# Altium PCB WINGS.PcbDoc
Units mm, origin at the board's own origin, x right, y up, seen from the top; angles counter-clockwise.
Board outline 25 x 15 mm, 4 copper layers (Top, GND_1, GND_2, Bottom), stack 0.76 mm thick; 5 components, 16 nets, 67 pads, 41 vias.
Unrouted connection lines stored in the file: 105.
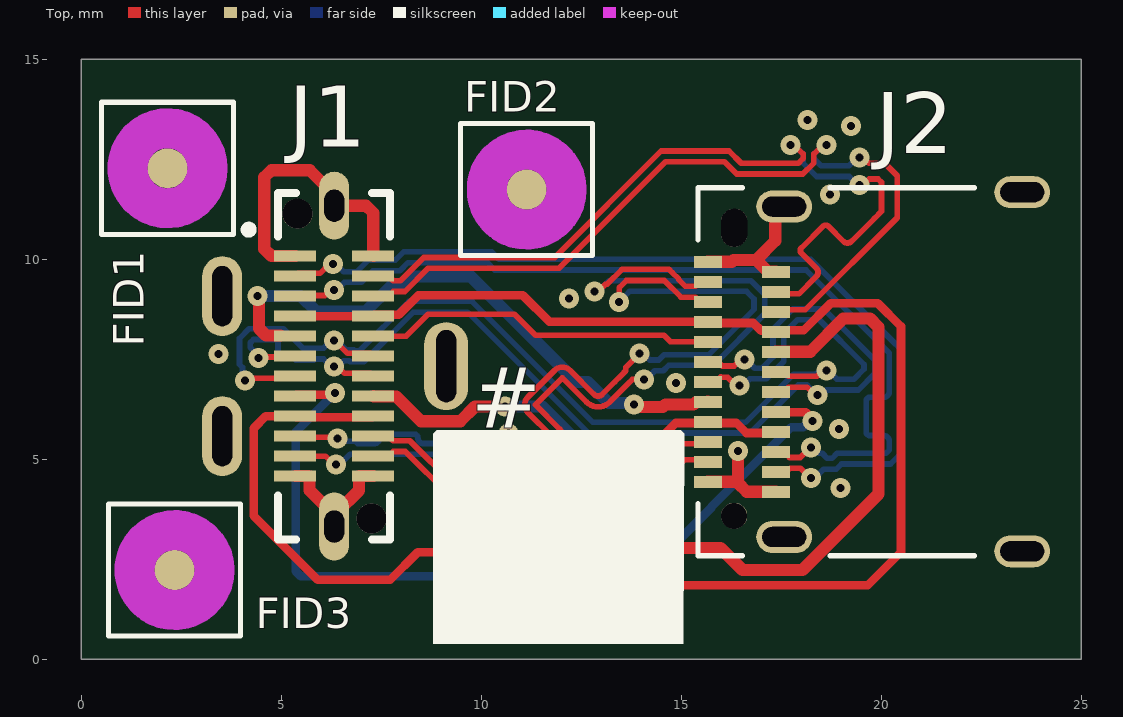
[diagram p0: Top view]
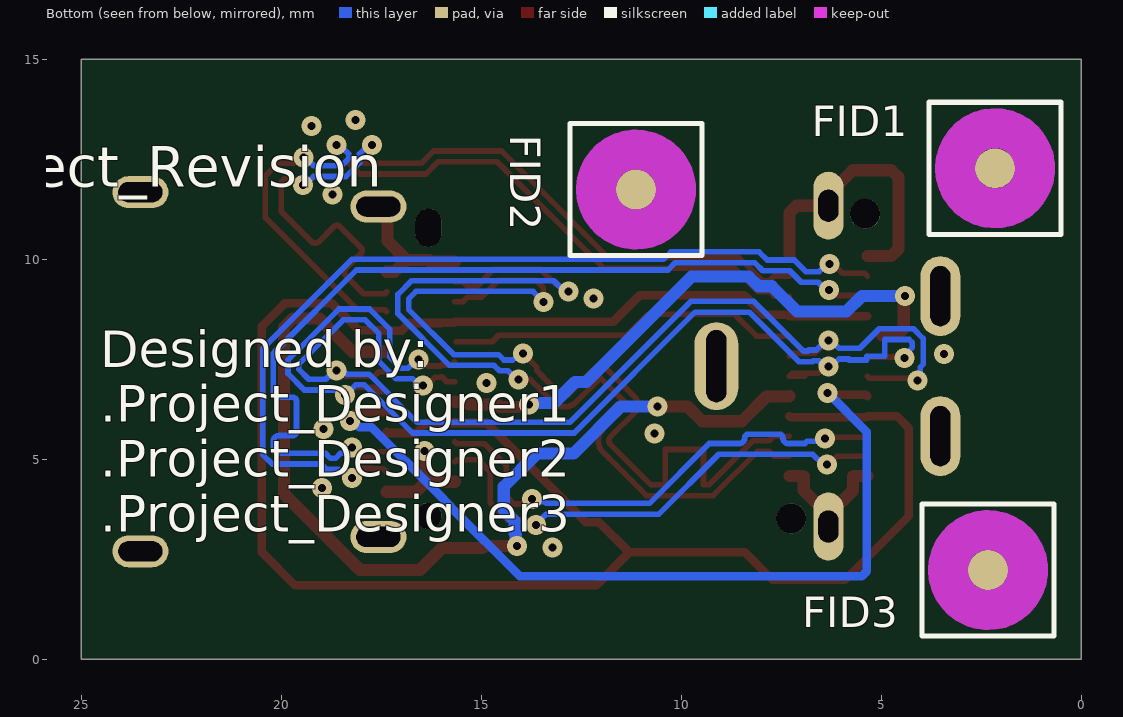
[diagram p1: Bottom view, seen from below]
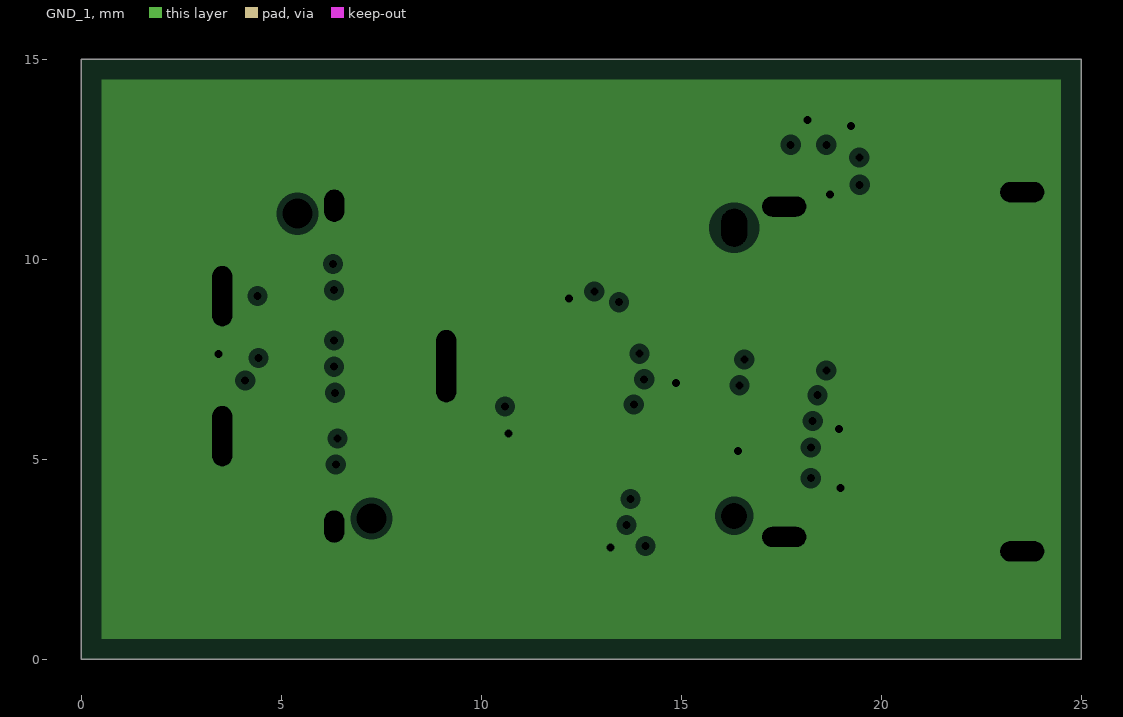
[diagram p2: GND_1, clearances drawn from the general rule]
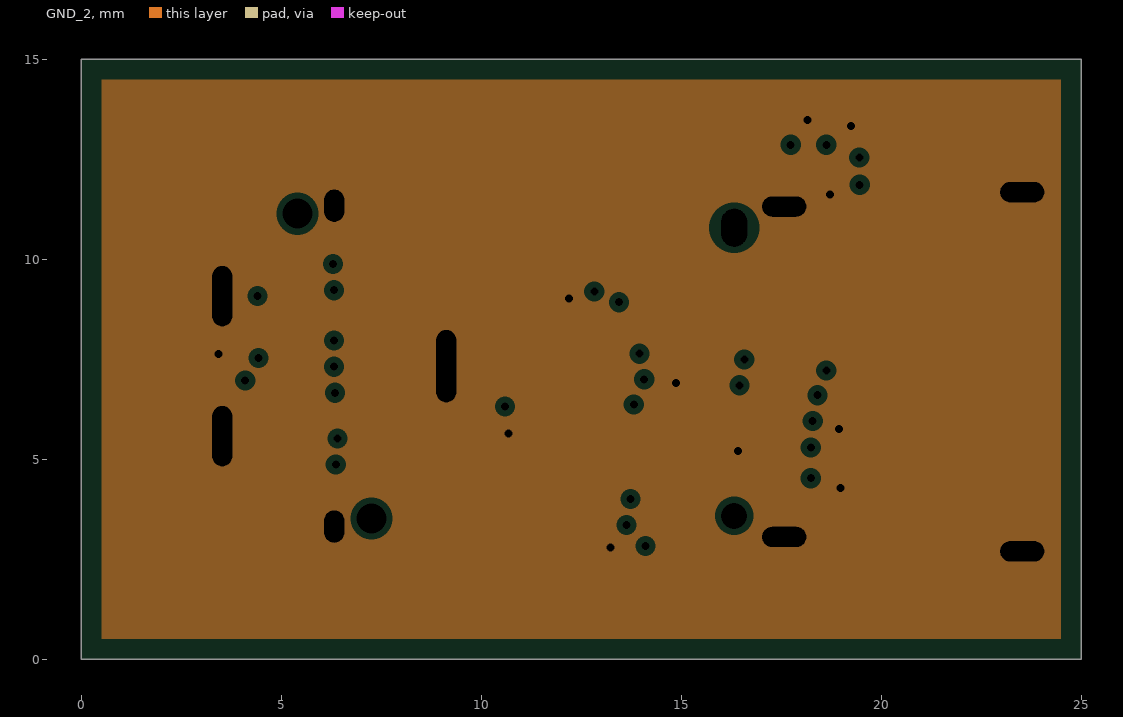
[diagram p3: GND_2, clearances drawn from the general rule]

## Layer stack, top to bottom
Top Solder: solder mask 0.0254, Solder Resist, Dk 4
Top: signal copper 0.035
Dielectric 1: prepreg 0.11, PP-015, Dk 4.29
GND_1: plane copper 0.035, net GND
Dielectric 2: core 0.4, Core-034, Dk 4.29
GND_2: plane copper 0.035, net GND
Dielectric 3: prepreg 0.11, PP-015, Dk 4.29
Bottom: signal copper 0.035
Bottom Solder: solder mask 0.0152, Solder Resist, Dk 4

## Board outline
0,0 0,15 25,15 25,0

## Design rules (kind name [scope] priority, off if disabled: settings)
BoardOutlineClearance BoardOutlineClearance-Silk [(OnLayer('Bottom Overlay')) OR (OnLayer('Top Overlay'))] p1: gap=0 ignorepadtopadclearanceinfootprint=FALSE
BoardOutlineClearance BoardOutlineClearance-Fiducials [InComponentClass('Fiducials')] p2: gap=0 ignorepadtopadclearanceinfootprint=FALSE
BoardOutlineClearance BoardOutlineClearance-MouseBites [InComponentClass('MouseBites')] p3: gap=0.254 ignorepadtopadclearanceinfootprint=FALSE except(0: Arc-SplitContinuation Track-SplitContinuation SMDPad-SplitContinuation THPad-OutlineEdge THPad-CavityEdge THPad-CutoutEdge THPad-SplitBarrior THPad-SplitContinuation Via-SplitContinuation Fill-SplitContinuation Poly-SplitContinuation Region-OutlineEdge Region-CavityEdge Region-CutoutEdge Region-SplitBarrior Region-SplitContinuation Text-SplitContinuation; 0.508: Arc-OutlineEdge Track-OutlineEdge SMDPad-OutlineEdge Via-OutlineEdge Fill-OutlineEdge Poly-OutlineEdge Text-OutlineEdge)
BoardOutlineClearance [All] p4: gap=0.305 ignorepadtopadclearanceinfootprint=FALSE
Clearance Clearance_HOLE_2_PAD [IsVia and (NOT InAnyComponent) vs IsSMTPin Or IsThruPin  or IsVia] p1: gap=0 ignorepadtopadclearanceinfootprint=FALSE except(0.051: SMDPad-Via THPad-Via; 0.152: Via-Via)
Clearance Clearance_VIA_SAME [IsVia and (NOT InAnyComponent) vs IsVia and (NOT InAnyComponent)] p2: gap=0.132 ignorepadtopadclearanceinfootprint=FALSE
Clearance Clearance_VIA [IsVia AND (InAnyComponent) vs IsVia AND (InAnyComponent)] p3: gap=0.31 ignorepadtopadclearanceinfootprint=FALSE
Clearance Clearance_GEN [All] p4: gap=0.127 ignorepadtopadclearanceinfootprint=FALSE
ComponentClearance [All] p1: gap=0.102 collisioncheckmode=3 verticalgap=0.102 showdistances=FALSE
DiffPairsRouting DIFF_100_OHM [InDifferentialPairClass('DIFF_100')] p1: maxlimit=0.127 minlimit=0.127 mostfreqgap=0.127 toplayer_minwidth=0.127 toplayer_maxwidth=0.127 toplayer_prefwidth=0.127 bottomlayer_minwidth=0.127 bottomlayer_maxwidth=0.127 bottomlayer_prefwidth=0.127 maxuncoupledlength=12.7
DiffPairsRouting DIFF_90_OHM [InDifferentialPairClass('DIFF_90')] p2: maxlimit=0.127 minlimit=0.127 mostfreqgap=0.127 toplayer_mingap=0.127 toplayer_minwidth=0.141 toplayer_maxwidth=0.141 toplayer_prefwidth=0.141 bottomlayer_maxgap=0.127 bottomlayer_prefgap=0.127 bottomlayer_minwidth=0.141 bottomlayer_maxwidth=0.141 bottomlayer_prefwidth=0.141 maxuncoupledlength=12.7
DiffPairsRouting DIFF_85_OHM [InDifferentialPairClass('DIFF_85')] p3: maxlimit=0.127 minlimit=0.127 mostfreqgap=0.127 toplayer_minwidth=0.216 toplayer_maxwidth=0.216 toplayer_prefwidth=0.216 bottomlayer_minwidth=0.216 bottomlayer_maxwidth=0.216 bottomlayer_prefwidth=0.216 maxuncoupledlength=12.7
HoleSize [All] p1: absolutevalues=TRUE maxlimit=6.5 minlimit=0.2 maxpercent=80.000 minpercent=20.000
HoleToHoleClearance HoleToHoleClearance_Via [All] p1: gap=0.203 allowstackedmicrovias=TRUE
MatchedLengths [InNetClass('TX')] p1: tolerance=0.051 checknetsindiffpair=FALSE checkdiffpairvsdiffpair=TRUE checkxsignals=TRUE checkothers=TRUE
MatchedLengths DiffMatching_WithinPair [InDifferentialPairClass('All Differential Pairs')] p2: tolerance=0.025 checknetsindiffpair=TRUE checkdiffpairvsdiffpair=FALSE checkxsignals=FALSE checkothers=FALSE
MinimumAnnularRing [All] p1: minimumring=0.1
MinimumSolderMaskSliver [All] p1: minsoldermaskwidth=0.1
PasteMaskExpansion [All] p1: expansion=-0.025
PlaneClearance [All] p1: clearance=0.152
PlaneConnect [All] p1: pad.planeconnectstyle=Relief pad.reliefexpansion=0.508 pad.reliefentries=4 pad.reliefconductorwidth=0.254 pad.reliefairgap=0.254 via.planeconnectstyle=Direct via.reliefexpansion=0.508 via.reliefentries=4 via.reliefconductorwidth=0.254 via.reliefairgap=0.254
PolygonConnect [All] p1: thpad.connectstyle=Relief thpad.reliefconductorwidth=0.254 thpad.reliefentries=4 thpad.polygonreliefangle="90 Angle" thpad.airgapwidth=0.254 smdpad.connectstyle=Direct smdpad.reliefconductorwidth=0.254 smdpad.reliefentries=4 smdpad.polygonreliefangle="90 Angle" smdpad.airgapwidth=0.254 via.connectstyle=Direct via.reliefconductorwidth=0.254 via.reliefentries=4 via.polygonreliefangle="90 Angle" via.airgapwidth=0.254
RoutingVias [All] p1: holewidth=0.25 width=0.55 viastyle="Through Hole" minholewidth=0.2 minwidth=0.5 maxholewidth=6.5 maxwidth=7.5
SilkToSilkClearance [All] p1: silktosilkclearance=0.025
SilkToSolderMaskClearance [IsPad] p1: minsilkscreentomaskgap=0.025 clearancetoexposedcopper=FALSE
SolderMaskExpansion [All] p1: expansion=0.07 istentingtop=FALSE
UnRoutedNet [All] p1: checkbadconnections=TRUE
Width Width_50_OHM [InNetClass('SE_50OHM')] p1: maxlimit=0.17 minlimit=0.17 preferedwidth=0.17 impedanceprofiledriven=TRUE impedanceprofileid={45CFA21F-16DB-42DB-9CA8-E4EF8CB52553} impedanceprofilevalue=50.000000 minimp=50.000000 maximp=50.000000 favimp=50.000000
Width [All] p2: maxlimit=2.54 minlimit=0.102 preferedwidth=0.305 minimp=50.000000 maximp=50.000000 favimp=50.000000
19 further rules are at their usual default settings.

## Classes and differential pairs
differential pair class DIFF_90: FC_D FC_RX1 FC_RX2 FC_TX1 FC_TX2
net class TX: FC_RX1_N FC_RX1_P FC_RX2_N FC_RX2_P
component class WINGS_Title: FID1 FID2 FID3
component class TOP: J1 J2
differential pair FC_TX2: +FC_TX2_P -FC_TX2_N
differential pair FC_TX1: +FC_TX1_P -FC_TX1_N
differential pair FC_RX2: +FC_RX2_P -FC_RX2_N
differential pair FC_RX1: +FC_RX1_P -FC_RX1_N
differential pair FC_D: +FC_D_P -FC_D_N

## Components (designator, comment, footprint, x,y, rotation, side; value= is the part's Value field where it differs from the comment)
FID1 "FID 1MM" FID_CIRCLE_1MM 2.156,12.276 r0 top
FID2 "FID 1MM" FID_CIRCLE_1MM 11.133,11.744 r0 top
FID3 "FID 1MM" FID_CIRCLE_1MM 2.331,2.231 r0 top
J1 "USB4151-GF-C" CON_USB-C_USB4151-GF-C 6.323,7.33 r90 top locked value="USB 3.2 Type C"
J2 "12401598E4#2A" CON_USB_3.2_TypeC_12401598E4#2A 16.323,7.189 r90 top locked value="USB 3.2 Type C"

## Footprints (in the part's own frame and the unit in brackets; to place one, negate y for a bottom-side part, rotate by r counter-clockwise, add the part's x,y. Pads: shape width x height; smd on the part's side, far side on the other; paste and mask are expansions set on the pad)
CON_USB-C_USB4151-GF-C [mm] "USB-C plug Vertical"
  rect 0.28x1.05 smd mask+0.045: A1(2.75,0.975) A2(2.25,0.975) A3(1.75,0.975) A4(1.25,0.975) A5(0.75,0.975) A6(0.25,0.975) A7(-0.25,0.975) A8(-0.75,0.975) A9(-1.25,0.975) A10(-1.75,0.975) A11(-2.25,0.975) A12(-2.75,0.975) B1(-2.75,-0.975) B2(-2.25,-0.975) B3(-1.75,-0.975) B4(-1.25,-0.975) B5(-0.75,-0.975) B6(-0.25,-0.975) B7(0.25,-0.975) B8(0.75,-0.975) B9(1.25,-0.975) B10(1.75,-0.975) B11(2.25,-0.975) B12(2.75,-0.975)
  oval 1.7x0.75 hole 0.5 slot 0.8 at 0 deg mask+0.05: S1(-4.01,0) S4(4.01,0)
  oval 2x1 hole 0.5 slot 1.5 at 0 deg mask+0.05: S2(-1.75,2.8) S3(1.75,2.8)
  oval 2.2x1.1 hole 0.5 slot 1.8 at 0 deg mask+0.05: S5(0,-2.8)
  round 0.75 hole 0.75 unplated mask+0: ""(-3.81,-0.93) ""(3.81,0.92)
  silkscreen extent -4.33,-1.4 4.33,2.24, body extent -4.33,-2.88 4.33,2.88, height 11.1
CON_USB_3.2_TypeC_12401598E4#2A [mm]
  oval 0.8x1.4 hole 0.5 slot 1.1 at 90 deg paste+0 mask+0.07: 1(-4.13,-1.25) 2(-4.49,-7.2) 3(4.49,-7.2) 4(4.13,-1.25)
  rect 0.3x0.7 smd paste-0.025 mask+0.04: A1(-2.75,0.66) A2(-2.25,0.66) A3(-1.75,0.66) A4(-1.25,0.66) A5(-0.75,0.66) A6(-0.25,0.66) A7(0.25,0.66) A8(0.75,0.66) A9(1.25,0.66) A10(1.75,0.66) A11(2.25,0.66) A12(2.75,0.66) B1(2.5,-1.04) B2(2,-1.04) B3(1.5,-1.04) B4(1,-1.04) B5(0.5,-1.04) B6(0,-1.04) B7(-0.5,-1.04) B8(-1,-1.04) B9(-1.5,-1.04) B10(-2,-1.04) B11(-2.5,-1.04) B12(-3,-1.04)
  round 0.65 hole 0.65 unplated mask+0.07: ""(-3.6,0)
  oval 0.95x0.65 hole 0.65 slot 0.95 at 0 deg paste+0 mask+0.07: ""(3.6,0)
  silkscreen extent -4.6,-6 4.6,0.91, body extent -4.6,-9.6 4.6,0.9, height 3.28
FID_CIRCLE_1MM [mm]
  round 1 smd paste-1 mask+1: 1(0,0)
  round 1 smd far side paste-1 mask+1: 2(0,0)
  Top keep-out circle w1: c0,0 r1
  Bottom keep-out circle w1: c0,0 r1
  silkscreen extent -1.65,-1.65 1.65,1.65

## Part data
FID1 FID2 FID3: library part FID_CIRCLE_1MM, "FID - FIDUCIAL 1MM CIRCLE DOUBLE-SIDED - 1MM", Package="1MM CIRCLE", Assembly Type=NONE, CreatedBy/Date="Jonathan Bouchard 2018-07-23", Cryo=UNKNOWN, GRAMS Lib Spec=2.8, HelpURL=https://www.pcb-3d.com/wordpress/wp-content/uploads/ipc-sm-782a_amendment_1_and_2.pdf, Magnetic Material=NO, Solder Paste Type=UNKNOWN, Stencil Thickness (Recommended)=UNKNOWN, VerifiedBy="Caroline Paulin - 25 juillet 2018"
J1: library part CON_USB_3.2_TypeC_USB4151-GF-C, "CON - USB-C (USB TYPE-C) USB 3.2 Gen 1 (USB 3.1 Gen 1, Superspeed (USB 3.0)) Plug Connector 24 Position Surface Mount, Through Hole", Current Rating="5A total", Manufacturer #1=GCT, Package=SMD/TH, Power Max=-, Supplier Part Number 1=2073-USB4151-GF-CCT-ND, Temperature="-40°C ~ 85°C", Voltage Rating=20VDC, Assembly Type=SMD/TH, CreatedBy/Date="Philippe Arsenault/2021-08-17", GRAMS Lib Spec=2.8, HelpURL=https://gct.co/connector/usb4151, Magnetic Material=Unknown, Note=Vertical, Part Number #1=USB4151-GF-C, Polarized=Yes, Supplier 1=Digi-Key, VerifiedBy="Hubert Dube/2021-09-02"
J2: library part CON_USB_3.2_TypeC_12401598E4#2A, "CON_USB - USB 3.2 Gen 2 (USB 3.1 Gen 2, Superspeed + (USB 3.1)) 24 pos Receptacle - R/A", Current Rating="5A total", Manufacturer #1="Amphenol ICC (Commercial Products)", Package="SMD + TH R/A", Power Max=-, Supplier Part Number 1=12401598E4#2ACT-ND, Temperature="max 105°C", Assembly Type="SMD + TH", CreatedBy/Date="Louis-Daniel Gaulin / 07-04-2021", GRAMS Lib Spec=2.8, HelpURL=https://www.amphenol-icc.com/media/wysiwyg/files/drawing/12401598xxx2a.pdf, Magnetic Material=Unknown, Part Number #1=12401598E4#2A, Polarized=Yes, Supplier 1=Digi-Key, VerifiedBy="Philippe Arsenault/2021-04-08", Voltage Rating=-

## Via types
v1: diameter 0.5, hole 0.2, Top to Bottom, tented both sides, 41 vias

## Nets (pads, with @x,y where several pads share a name; then routed paths per layer and width w, separated by ;. In a path a pad name is that pad's centre, name@x,y a point inside that pad or via, vN(x,y) a via of type N, cw(c..) or ccw(c..) an arc to the next point about the centre after c; other vN are vias at no path point)
5V: J1.A4 J1.A9 J1.B4 J1.B9 J2.A4 J2.A9 J2.B4 J2.B9 | length 52.5
  Top w0.216: J1.A4 J1.B9 7.33,8.612 7.937,8.612 8.427,9.102 11.039,9.102 11.702,8.439 J2.A9 15.686,8.416 16.006,8.416 16.015,8.407 16.801,8.407 16.996,8.212 J2.B4@17.391,8.212 ; J1.B4 7.266,6.048 5.38,6.048 J1.A9 4.611,6.08 4.31,5.779 4.31,3.585 5.91,1.985 7.72,1.985 8.41,2.675 11.303,2.675 ; J2.B9 17.331,5.657 16.627,5.657 16.377,5.907 15.695,5.907 J2.A4 15.631,5.907 14.863,5.907 12.384,3.428 12.056,3.428 11.303,2.675 ; J2.B4@17.471,8.217 17.485,8.231 18.064,8.231 18.738,8.905 19.908,8.905 20.491,8.323 20.491,2.684 19.656,1.848 12.129,1.848 11.303,2.675
CC1: J1.A5 J2.A5 | length 14.6
  Top w0.305: v1(4.402,9.086) 4.439,9.049 4.439,8.271 4.618,8.093 4.868,8.093 J1.A5@4.975,8.092 ; v1(13.811,6.373) 13.864,6.373 13.93,6.306 14.537,6.306 14.604,6.373 15.308,6.373 15.372,6.437 15.66,6.437 J2.A5
  Bottom w0.305: v1(4.402,9.086) 5.486,9.086 5.873,8.699 7.11,8.699 7.739,9.328 8.074,9.328 8.313,9.567 9.744,9.567 12.377,6.934 12.66,6.934 13.184,6.41 13.774,6.41 v1(13.811,6.373)
CC2: J1.B5 J2.B5 | length 24
  Top w0.305: J1.B5 7.311,6.568 7.873,6.568 8.49,5.951 9.476,5.951 9.843,6.318 v1(10.592,6.318) ; v1(14.103,2.83) 14.918,2.83 14.963,2.785 15.982,2.785 16.531,2.236 18.033,2.236 19.93,4.133 19.93,8.304 19.717,8.518 19.049,8.518 18.221,7.689 J2.B5
  Bottom w0.305: v1(10.592,6.318) 11.521,6.318 12.692,5.147 13.606,5.147 14.437,4.316 14.437,3.737 14.167,3.467 14.167,3.151 14.141,3.125 14.141,2.867 v1(14.103,2.83)
FC_D_N: J1.A6 J1.B6 J2.A7 J2.B7 | length 29.2
  Top w0.141: v1(4.426,7.534) 4.449,7.557 5.325,7.557 J1.A6 ; v1(6.321,7.316) 6.418,7.316 6.584,7.15 7.229,7.15 J1.B6 J1.B6@6.913,7.08 ; J2.A7 15.742,7.36 15.999,7.36 16.025,7.334 16.319,7.334 16.478,7.493 v1(16.575,7.493) ; J2.B7 17.563,6.689 17.679,6.805 18.143,6.805 18.345,6.603 v1(18.405,6.603)
  Bottom w0.141: v1(4.426,7.534) 4.426,7.592 4.223,7.796 4.223,7.913 4.305,7.996 4.846,7.996 4.917,7.996 4.917,7.573 5.363,7.573 5.363,7.485 5.81,7.485 5.81,7.508 6.058,7.508 6.247,7.319 6.251,7.316 v1(6.321,7.316) 6.418,7.316 6.565,7.463 6.7,7.463 6.722,7.441 7.061,7.441 8.3,8.68 9.654,8.68 12.678,5.657 16.717,5.657 17.923,6.862 18.143,6.862 18.402,6.603 v1(18.405,6.603) 18.502,6.603 18.634,6.734 19.426,6.734 19.835,7.143 19.835,7.483 18.561,8.757 17.793,8.757 17.292,8.255 17.292,7.556 17.014,7.278 16.837,7.278 16.623,7.493 v1(16.575,7.493)
FC_D_P: J1.A7 J1.B7 J2.A6 J2.B6 | length 29.2
  Top w0.141: v1(4.098,6.97) 4.153,7.025 5.293,7.025 J1.A7 ; v1(6.321,7.968) 6.337,7.968 6.655,7.65 7.229,7.65 J1.B7 ; J2.A6 15.863,6.939 15.99,7.066 16.004,7.052 16.158,7.052 16.359,6.851 v1(16.456,6.851) ; J2.B6 17.563,7.189 17.679,7.073 18.385,7.073 18.528,7.217 v1(18.626,7.217)
  Bottom w0.141: v1(4.098,6.97) 4.029,7.039 4.029,7.298 3.954,7.373 3.954,8.024 4.194,8.264 5.051,8.264 5.539,7.776 6.058,7.776 6.251,7.968 v1(6.321,7.968) 6.391,7.968 6.628,7.731 6.811,7.731 6.833,7.709 6.95,7.709 8.189,8.949 9.765,8.949 12.789,5.925 16.606,5.925 17.812,7.131 18.363,7.131 18.381,7.148 18.557,7.148 v1(18.626,7.217) 18.674,7.217 18.888,7.003 19.315,7.003 19.566,7.254 19.566,7.371 18.449,8.488 17.905,8.488 17.56,8.144 17.56,7.445 17.125,7.01 16.712,7.01 16.553,6.851 v1(16.456,6.851)
FC_RX1_N: J1.A3 J2.B10 | length 22.5
  Top w0.141: J1.A3@5.348,9.08 5.365,9.097 6.085,9.097 6.216,9.228 v1(6.313,9.228) ; J2.B10 17.563,5.189 17.706,5.046 17.974,5.046 18.224,5.296 v1(18.236,5.296)
  Bottom w0.141: v1(6.313,9.228) 6.379,9.228 6.576,9.425 7.002,9.425 7.29,9.713 7.964,9.713 8.168,9.917 10.15,9.917 10.333,9.734 18.121,9.734 20.14,7.715 20.2,7.655 20.2,6.69 cw(c20.058,6.69) 20.058,6.549 19.715,6.549 ccw(c19.715,6.454) 19.619,6.454 19.619,5.69 ccw(c19.715,5.69) 19.715,5.595 20.058,5.595 cw(c20.058,5.453) 20.2,5.453 20.2,5.233 20.154,5.187 20.117,5.15 18.892,5.15 18.766,5.024 18.649,5.024 18.523,5.15 v1@18.436,5.15
FC_RX1_P: J1.A2 J2.B11 | length 22.7
  Top w0.141: J1.A2 5.418,9.65 5.965,9.65 6.196,9.881 v1(6.294,9.881) ; J2.B11 17.442,4.769 17.715,4.769 17.725,4.778 17.976,4.778 18.225,4.528 v1(18.238,4.528)
  Bottom w0.141: v1(6.294,9.881) 6.368,9.881 6.556,9.693 6.891,9.693 7.178,9.981 7.852,9.981 8.056,10.186 10.261,10.186 10.444,10.003 18.232,10.003 20.284,7.951 20.468,7.766 20.468,5.122 20.228,4.882 19.004,4.882 18.878,4.756 18.562,4.756 18.335,4.528 v1(18.238,4.528)
FC_RX2_N: J1.B3 J2.A10 | length 22.7
  Top w0.141: J1.B3@7.298,5.58 7.683,5.58 7.799,5.464 8.211,5.464 9.315,4.36 9.375,4.36 9.446,4.36 9.446,5.245 10.399,5.245 10.399,4.36 10.759,4.36 11.473,5.074 11.622,5.223 11.766,5.367 ; 11.766,5.568 11.161,6.173 cw(c11.35,6.363) 11.161,6.553 11.835,7.227 cw(c12.025,7.038) 12.215,7.227 12.82,6.621 ccw(c12.92,6.721) 13.02,6.621 13.345,6.946 ; 11.767,5.368 ccw(c11.667,5.468) 11.767,5.568 ; 13.345,6.946 13.489,7.09 13.612,7.213 13.612,7.298 v1(13.955,7.641) ; v1(13.443,8.929) 13.45,8.936 13.45,9.294 13.625,9.469 14.563,9.469 14.57,9.476 14.99,9.055 15.347,9.055 15.463,8.939 J2.A10
  Bottom w0.141: v1(13.443,8.929) 13.443,8.935 13.705,9.198 16.632,9.198 16.818,9.012 16.818,8.749 15.688,7.618 14.572,7.618 14.436,7.482 14.211,7.482 14.052,7.641 v1(13.955,7.641)
FC_RX2_P: J1.B2 J2.A11 | length 22.7
  Top w0.141: J1.B2 7.683,5.08 7.799,5.196 8.1,5.196 9.204,4.092 10.87,4.092 11.812,5.034 11.956,5.178 ccw(c11.667,5.468) 11.956,5.758 11.351,6.363 ; 11.351,6.364 12.024,7.037 ; 12.026,7.037 12.63,6.432 ccw(c12.92,6.721) 13.21,6.432 13.534,6.756 ; v1(12.825,9.198) 12.922,9.198 13.102,9.377 13.145,9.377 13.518,9.75 14.447,9.75 14.453,9.756 14.686,9.756 14.768,9.674 14.938,9.504 14.938,9.486 15.101,9.323 15.347,9.323 15.463,9.439 J2.A11 ; 13.535,6.757 13.679,6.901 13.778,7 v1(14.073,7)
  Bottom w0.141: v1(12.825,9.198) 12.922,9.198 13.19,9.466 16.743,9.466 17.087,9.123 17.087,8.637 15.799,7.35 14.683,7.35 14.547,7.214 14.335,7.214 14.121,7 v1(14.073,7)
FC_SBU1: J1.B8 J2.A8 | length 8.8
  Top w0.141: J1.B8 8.123,8.08 8.671,8.628 10.831,8.628 11.358,8.101 14.564,8.101 14.725,7.939 J2.A8@15.631,7.939
FC_SBU2: J1.A8 J2.B8 | length 21.5
  Top w0.216: J1.A8 5.38,6.612 6.289,6.612 v1(6.34,6.663) ; J2.B8 17.371,6.181 18.114,6.181 18.285,6.009 v1(18.285,5.961)
  Bottom w0.216: v1(6.34,6.663) 5.361,5.685 5.361,2.201 5.488,2.074 14.034,2.074 15.763,3.803 15.763,3.821 16.091,4.149 17.744,5.803 18.05,5.803 18.209,5.961 v1(18.285,5.961)
FC_TX1_N: J1.A10 J2.A3 | length 12.5
  Top w0.141: J1.A10@5.348,5.58 5.379,5.549 6.372,5.549 v1(6.403,5.519) ; v1(13.729,4.005) 13.821,4.005 13.944,3.882 14.185,3.882 14.377,4.075 14.377,4.849 14.917,5.388 15.612,5.388 J2.A3
  Bottom w0.141: v1(6.403,5.519) 6.471,5.45 6.851,5.45 6.907,5.394 7.248,5.394 7.319,5.394 ccw(c7.319,5.535) 7.46,5.535 cw(c7.555,5.535) 7.555,5.631 8.319,5.631 cw(c8.319,5.535) 8.414,5.535 ccw(c8.556,5.535) 8.556,5.394 8.828,5.394 9.301,5.394 10.797,3.898 13.377,3.898 13.416,3.937 13.661,3.937 v1(13.729,4.005)
FC_TX1_P: J1.A11 J2.A2 | length 12.4
  Top w0.141: J1.A11 6.101,5.08 6.313,4.868 v1(6.363,4.868) ; v1(13.628,3.361) 13.725,3.361 13.849,3.484 14.35,3.484 14.776,3.91 14.776,4.684 15.082,4.99 15.612,4.99 J2.A2
  Bottom w0.141: v1(6.363,4.868) 6.46,4.868 6.718,5.125 6.948,5.125 9.065,5.125 10.561,3.63 13.377,3.63 13.628,3.379 v1(13.628,3.361)
FC_TX2_N: J1.B10 J2.B3 | length 21.3
  Top w0.141: J1.B10@7.298,9.08 7.683,9.08 7.799,9.196 8.089,9.196 8.672,9.779 11.947,9.779 14.607,12.439 16.081,12.439 16.387,12.133 18.036,12.133 18.313,12.409 18.313,12.637 18.538,12.862 v1(18.623,12.862) ; J2.B3 17.416,8.742 18.102,8.742 20.398,11.038 20.398,12.088 20.085,12.402 19.692,12.402 19.547,12.547 v1(19.45,12.547)
  Bottom w0.141: v1(18.623,12.862) 18.539,12.862 18.313,12.636 18.313,12.519 18.493,12.339 19.188,12.339 19.396,12.547 v1(19.45,12.547)
FC_TX2_P: J1.B11 J2.B2 | length 21.3
  Top w0.141: J1.B11 7.683,9.58 7.799,9.464 7.978,9.464 8.561,10.047 11.836,10.047 14.496,12.707 16.192,12.707 16.498,12.401 17.925,12.401 18.045,12.52 18.045,12.637 17.819,12.862 v1(17.734,12.862) ; J2.B2 17.416,9.136 17.939,9.136 18.329,9.526 18.379,9.576 ccw(c18.279,9.676) 18.379,9.775 18.002,10.152 cw(c18.07,10.219) 18.002,10.287 18.542,10.826 cw(c18.609,10.759) 18.677,10.826 19.053,10.45 ccw(c19.153,10.549) 19.253,10.45 19.828,11.025 20.004,11.201 20.004,11.925 19.921,12.008 19.702,12.008 19.557,11.863 v1(19.46,11.863)
  Bottom w0.141: v1(17.734,12.862) 17.819,12.862 18.045,12.636 18.045,12.408 18.382,12.071 19.198,12.071 19.406,11.863 v1(19.46,11.863)
GND: J1.A1 J1.A12 J1.B1 J1.B12 J1.S1 J1.S2 J1.S3 J1.S4 J1.S5 J2.1 J2.2 J2.3 J2.4 J2.A1 J2.A12 J2.B1 J2.B12 | length 16.3
  Top w0.305: J1.A12 5.696,4.58 5.708,4.568 5.708,4.22 6.25,3.678 6.397,3.678 6.939,4.22 6.939,4.568 6.951,4.58 J1.B1 ; J1.A1 4.752,10.08 4.573,10.259 4.573,12.05 4.752,12.229 5.713,12.229 6.323,11.618 J1.S4 7.12,11.34 7.298,11.162 J1.B12 ; J2.A1 16.384,4.439 16.415,4.409 ; J2.A12 15.665,9.942 16.262,9.942 16.306,9.985 16.871,9.985 ; v1(16.415,5.209) 16.415,4.409 ; J2.B12 16.634,4.189 16.415,4.409 ; J2.B1 17.167,9.689 16.871,9.985 ; J2.4 17.348,11.095 17.348,10.462 16.871,9.985
  other v1: 13.227,2.792 18.984,4.285 10.673,5.65 18.945,5.762 14.868,6.902 3.434,7.63 12.196,9.022 18.717,11.623 19.241,13.334 18.152,13.488
pads on no net: FID1.1 FID1.2 FID2.1 FID2.2 FID3.1 FID3.2 J1. J2.

## Polygon pours and split planes (outlines as drawn)
no net on Top Overlay "NONET_L-01_P-001" (solid): 8.795,5.733 8.795,0.393 15.051,0.393 15.074,5.733
GND on GND_1 (split plane): 24.49,0.51 0.51,0.51 0.51,14.49 24.49,14.49
GND on GND_2 (split plane): 24.49,0.51 0.51,0.51 0.51,14.49 24.49,14.49

## Other copper
Top:
  text "LAYER 1: TOP" at 42.018,62.778 h2.54
Bottom:
  text "LAYER 4: BOTTOM" at 42.018,44.939 h2.54
GND_1 (plane layer: these items are gaps in the copper):
  text "LAYER 2: GND_1" at 42.018,56.69 h2.54
GND_2 (plane layer: these items are gaps in the copper):
  text "LAYER 2: GND_2" at 42.018,50.603 h2.54

## Silkscreen, mask and mechanical layers (free items; w line width, h text height)
Top Overlay:
  text "TOP SILKSCREEN" at 42.018,74.106 h2.54
  text "#" at 9.752,5.786 h1.52
Bottom Overlay:
  text "BOTTOM SILKSCREEN" at 42.018,33.61 h2.54
  text "Rev .Project_Revision" at 32.395,11.82 h1.02
  text "Designed by: / .Project_Designer1 / .Project_Designer2 / .Project_Designer3" at 24.525,3.191 h0.91
Top Paste:
  text "TOP PASTEMASK" at 42.018,-0.375 h2.54
Bottom Paste:
  text "BOTTOM PASTEMASK" at 42.018,-28.697 h2.54
Top Solder:
  text "TOP SOLDERMASK" at 42.018,68.442 h2.54
Bottom Solder:
  text "BOTTOM SOLDERMASK" at 42.018,39.274 h2.54
Top Assembly:
  text "TOP ASSEMBLY" at 42.018,-6.04 h2.54
Bottom Assembly:
  text "BOTTOM ASSEMBLY" at 42.018,-34.361 h2.54
Top Designators:
  text "TOP DESIGNATORS" at 42.018,-11.704 h2.54
Bottom Designators:
  text "BOTTOM DESIGNATORS" at 42.018,-45.689 h2.54
Board Outline:
  the board outline again, w0.254
  text "BOARD OUTLINE" at 42.018,27.946 h2.54
Panel Outline:
  text "PANEL OUTLINE" at 42.018,22.282 h2.54
Route Tool Path:
  text "ROUTE TOOL PATH" at 42.018,16.617 h2.54
Panel V-Grove:
  text "PANEL V-GROOVE" at 42.018,10.953 h2.54
Manufacturing Notes:
  text "MANUFACTURING NOTES" at 42.018,-57.018 h2.54
Top 3D Models:
  text "TOP 3D MODELS" at 42.018,-23.032 h2.54
Bottom 3D Models:
  text "BOTTOM 3D MODELS" at 42.018,-51.354 h2.54
Top Courtyard:
  text "TOP COURTYARD" at 42.018,-17.368 h2.54
Bottom Courtyard:
  text "BOTTOM COURTYARD" at 42.018,-40.025 h2.54
Drill Drawing:
  text "DRILL DRAWING" at 42.018,5.289 h2.54

## Text inside footprints (layer, text, board x,y; h text height)
J2: Top Assembly "A1" at 16.196,3.125 h0.51 r90; Top Assembly "B12" at 18.49,3.019 h0.51 r90; Top Assembly "B1" at 18.607,10.237 h0.51 r90; Top Assembly "A12" at 16.196,10.11 h0.51 r90